# EAGLE board uc2950-v1 (EAGLE 8.7.1)
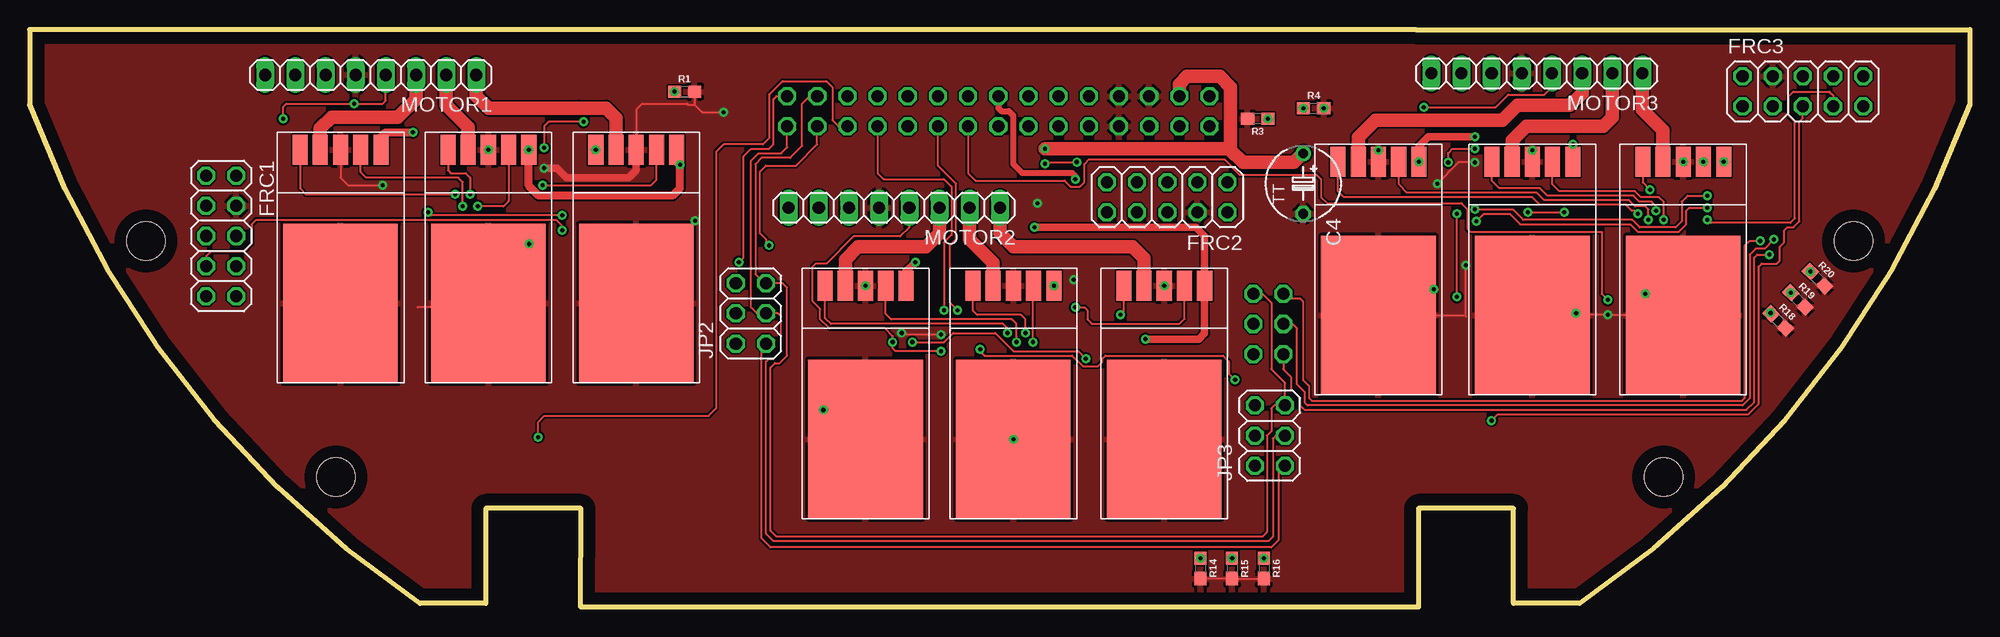
[diagram p0: board, top side]
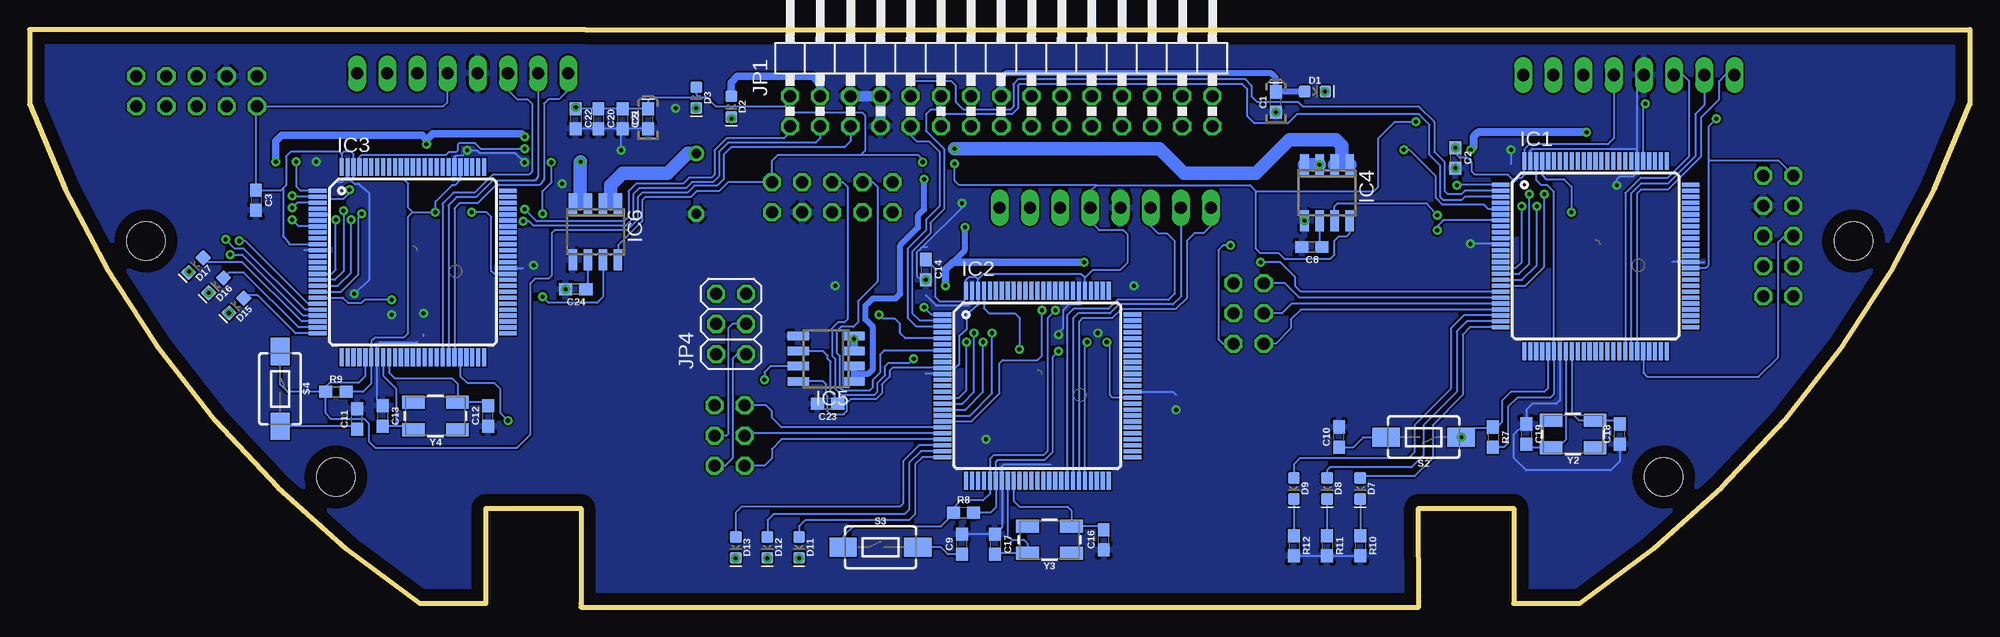
[diagram p1: board, bottom side, seen from below]

Size 163.33 x 48.61 mm. Coordinates in mm from the lower left corner, seen from the top.
Outline: 116.92,0 116.92,8.32 124.92,8.32 124.92,0.32 130.5,0.32 arc36 163.33,42.32 163.33,48.61 116.67,48.61
Outline: 38.4,8.32 46.4,8.32 46.4,0 116.92,0
Outline: 38.4,0.32 32.83,0.32 arc-36 0,42.32 0,48.61 116.59,48.61
Outline: 116.92,0.32 116.92,0
Outline: 38.4,8.32 38.4,0.32
Copper layers (1*16): Top 0.035mm / dielectric 1.5mm / Bottom 0.035mm
Design rules "default": minimum track width 6mil, minimum drill 0.35mm, track to track 6mil, track to pad 6mil, pad to pad 6mil, via to via 6mil, smd to smd 6mil, copper to edge 40mil, drill to drill 6mil, minimum pad ring 10mil, minimum via ring 8mil, stop-mask expansion 4mil, vias tented up to drill 0mil, thermal gap 10mil
Holes 3.2 mm at 137.55,10.96 25.77,10.96 9.78,30.82 153.55,30.82

## Footprints (pad centres in the part's own frame; a part is rotated, then mirrored left to right if it is on the bottom)
0603-POLAR = smd 1.1 x 1: + 0.85,0; - -0.85,0
0603 = smd 1.1 x 1: 1 -0.85,0; 2 0.85,0
TAP5-60 = drill 0.813: + -2.54,0 | drill 0.813 octagon: - 2.54,0
LED-0603 = smd 1 x 1: A -0.877,0; C 0.877,0
2X05 = drill 1.016 octagon: 1 -5.08,-1.27; 2 -5.08,1.27; 3 -2.54,-1.27; 4 -2.54,1.27; 5 0,-1.27; 6 0,1.27; 7 2.54,-1.27; 8 2.54,1.27; 9 5.08,-1.27; 10 5.08,1.27
TQFP100 = smd 1.5 x 0.35: 1 -8,6; 2 -8,5.5; 3 -8,5; 4 -8,4.5; 5 -8,4; 6 -8,3.5; 7 -8,3; 8 -8,2.5; 9 -8,2; 10 -8,1.5; 11 -8,1; 12 -8,0.5; 13 -8,0; 14 -8,-0.5; 15 -8,-1; 16 -8,-1.5; 17 -8,-2; 18 -8,-2.5; 19 -8,-3; 20 -8,-3.5; 21 -8,-4; 22 -8,-4.5; 23 -8,-5; 24 -8,-5.5; 25 -8,-6; 51 8,-6; 52 8,-5.5; 53 8,-5; 54 8,-4.5; 55 8,-4; 56 8,-3.5; 57 8,-3; 58 8,-2.5; 59 8,-2; 60 8,-1.5; 61 8,-1; 62 8,-0.5; 63 8,0; 64 8,0.5; 65 8,1; 66 8,1.5; 67 8,2; 68 8,2.5; 69 8,3; 70 8,3.5; 71 8,4; 72 8,4.5; 73 8,5; 74 8,5.5; 75 8,6 | smd 0.35 x 1.5: 26 -6,-8; 27 -5.5,-8; 28 -5,-8; 29 -4.5,-8; 30 -4,-8; 31 -3.5,-8; 32 -3,-8; 33 -2.5,-8; 34 -2,-8; 35 -1.5,-8; 36 -1,-8; 37 -0.5,-8; 38 0,-8; 39 0.5,-8; 40 1,-8; 41 1.5,-8; 42 2,-8; 43 2.5,-8; 44 3,-8; 45 3.5,-8; 46 4,-8; 47 4.5,-8; 48 5,-8; 49 5.5,-8; 50 6,-8; 76 6,8; 77 5.5,8; 78 5,8; 79 4.5,8; 80 4,8; 81 3.5,8; 82 3,8; 83 2.5,8; 84 2,8; 85 1.5,8; 86 1,8; 87 0.5,8; 88 0,8; 89 -0.5,8; 90 -1,8; 91 -1.5,8; 92 -2,8; 93 -2.5,8; 94 -3,8; 95 -3.5,8; 96 -4,8; 97 -4.5,8; 98 -5,8; 99 -5.5,8; 100 -6,8
SO08 = smd 0.72 x 1.78: 1 -1.905,-2.35; 2 -0.635,-2.35; 3 0.635,-2.35; 4 1.905,-2.35; 5 1.905,2.35; 6 0.635,2.35; 7 -0.635,2.35; 8 -1.905,2.35
2X15/90 = drill 1.016 octagon: 1 -17.78,-6.35; 2 -17.78,-3.81; 3 -15.24,-6.35; 4 -15.24,-3.81; 5 -12.7,-6.35; 6 -12.7,-3.81; 7 -10.16,-6.35; 8 -10.16,-3.81; 9 -7.62,-6.35; 10 -7.62,-3.81; 11 -5.08,-6.35; 12 -5.08,-3.81; 13 -2.54,-6.35; 14 -2.54,-3.81; 15 0,-6.35; 16 0,-3.81; 17 2.54,-6.35; 18 2.54,-3.81; 19 5.08,-6.35; 20 5.08,-3.81; 21 7.62,-6.35; 22 7.62,-3.81; 23 10.16,-6.35; 24 10.16,-3.81; 25 12.7,-6.35; 26 12.7,-3.81; 27 15.24,-6.35; 28 15.24,-3.81; 29 17.78,-6.35; 30 17.78,-3.81
2X03 = drill 1.016 octagon: 1 -2.54,-1.27; 2 -2.54,1.27; 3 0,-1.27; 4 0,1.27; 5 2.54,-1.27; 6 2.54,1.27
UC2950 = smd 1.27 x 2.54: P$1 1.93,3.607; P$2 3.632,3.607; P$3 5.334,3.607; P$4 7.036,3.607; P$5 8.738,3.607 | smd 9.652 x 13.386: P$6 5.334,-9.309
1X08 = drill 1.016 long: 1 -8.89,0; 2 -6.35,0; 3 -3.81,0; 4 -1.27,0; 5 1.27,0; 6 3.81,0; 7 6.35,0; 8 8.89,0
TACTILE_SWITCH_SMD_6.0X3.5MM = smd 2.3 x 1.6: 1 -3.15,0; 2 3.15,0
CRYSTAL-SMD-5X3.2-4PAD = smd 1.9 x 1.1: 1 -1.85,-1.15; 2 1.85,-1.15; 3 1.85,1.15; 4 -1.85,1.15

## Placement (x,y rotation side)
C1  10uF  [0603-POLAR]  58.43,42.51 90 bottom
C2  0.1uF  [0603]  43.31,37.81 270 bottom
C3  0.1uF  [0603]  144.28,34.25 270 bottom
C4  47uF  [TAP5-60]  107.2,35.65 270 top
C5  10uF  [0603-POLAR]  111.26,41.11 90 bottom
C8  1nF  [0603]  55.38,30.32 180 bottom
C9  0.1uF  [0603]  84.84,5.3 90 bottom
C10  0.1uF  [0603]  53.09,14.32 90 bottom
C11  0.1uF  [0603]  135.77,15.84 90 bottom
C12  22pF  [0603]  124.72,16.09 90 bottom
C13  22pF  [0603]  133.61,16.09 270 bottom
C14  0.1uF  [0603]  87.89,28.41 270 bottom
C16  22pF  [0603]  72.91,5.68 90 bottom
C17  22pF  [0603]  82.05,5.3 270 bottom
C18  22pF  [0603]  29.47,14.57 90 bottom
C19  22pF  [0603]  37.35,14.57 270 bottom
C20  0.1uF  [0603]  115.45,41.11 270 bottom
C21  0.1uF  [0603]  113.42,41.11 270 bottom
C22  0.1uF  [0603]  117.36,41.11 270 bottom
C23  1nF  [0603]  96.15,17.11 180 bottom
C24  1nF  [0603]  117.36,26.76 180 bottom
D1  Yellow  [LED-0603]  55.13,43.4 0 bottom
D2  Yellow  [LED-0603]  104.27,42.13 270 bottom
D3  Yellow  [LED-0603]  107.2,42.89 270 bottom
D7  Yellow  [LED-0603]  51.32,10 270 bottom
D8  Yellow  [LED-0603]  54.11,10 270 bottom
D9  Yellow  [LED-0603]  56.9,10 270 bottom
D11  Yellow  [LED-0603]  98.56,5.04 270 bottom
D12  Yellow  [LED-0603]  101.23,5.04 270 bottom
D13  Yellow  [LED-0603]  103.89,5.04 270 bottom
D15  Yellow  [LED-0603]  145.93,25.38 225 bottom
D16  Yellow  [LED-0603]  147.63,27.09 225 bottom
D17  Yellow  [LED-0603]  149.34,28.8 225 bottom
FRC1  [2X05]  16.12,31.24 270 top
FRC2  [2X05]  95.77,34.51 180 top
FRC3  [2X05]  149.28,43.43 0 top
IC1  ATMEGA2560-16AU  [TQFP100]  31.5,29.56 0 bottom
IC2  ATMEGA2560-16AU  [TQFP100]  78.49,18.63 0 bottom
IC3  ATMEGA2560-16AU  [TQFP100]  131.07,29.05 0 bottom
IC4  ACS712  [SO08]  54.11,34.89 180 bottom
IC5  ACS712  [SO08]  96.27,20.92 90 bottom
IC6  ACS712  [SO08]  115.7,31.59 180 bottom
JP1  [2X15/90]  81.54,46.83 0 bottom
JP2  [2X03]  60.71,24.73 90 top
JP3  [2X03]  104.4,14.44 90 top
JP4  [2X03]  104.27,23.84 90 bottom
MIC1  [UC2950]  20.84,34.89 0 top
MIC2  [UC2950]  33.28,34.89 0 top
MIC3  [UC2950]  45.73,34.89 0 top
MIC4  [UC2950]  65.03,23.46 0 top
MIC5  [UC2950]  77.48,23.46 0 top
MIC6  [UC2950]  90.18,23.46 0 top
MIC7  [UC2950]  133.87,33.87 0 top
MIC8  [UC2950]  121.17,33.87 0 top
MIC9  [UC2950]  108.21,33.87 0 top
MOTOR1  [1X08]  28.71,44.8 180 top
MOTOR2  [1X08]  72.78,33.62 180 top
MOTOR3  [1X08]  126.88,44.92 180 top
R1  1k  [0603]  55.13,43.4 0 top
R3  1k  [0603]  103.39,41.11 180 top
R4  1k  [0603]  108.08,42 0 top
R7  1k  [0603]  40.14,14.32 270 bottom
R8  1k  [0603]  84.72,7.97 0 bottom
R9  1k  [0603]  137.55,18.13 0 bottom
R10  1k  [0603]  51.32,5.17 270 bottom
R11  1k  [0603]  54.11,5.17 270 bottom
R12  1k  [0603]  56.9,5.17 270 bottom
R14  1k  [0603]  98.56,3.27 270 top
R15  1k  [0603]  101.23,3.27 270 top
R16  1k  [0603]  103.89,3.27 270 top
R18  1k  [0603]  147.2,24.09 315 top
R19  1k  [0603]  148.85,25.87 315 top
R20  1k  [0603]  150.5,27.65 315 top
S2  MOMENTARY-SWITCH-SPST-SMD-6.0X3.5MM  [TACTILE_SWITCH_SMD_6.0X3.5MM]  45.98,14.32 180 bottom
S3  MOMENTARY-SWITCH-SPST-SMD-6.0X3.5MM  [TACTILE_SWITCH_SMD_6.0X3.5MM]  91.7,5.04 0 bottom
S4  MOMENTARY-SWITCH-SPST-SMD-6.0X3.5MM  [TACTILE_SWITCH_SMD_6.0X3.5MM]  142.25,18.38 270 bottom
Y2  16MHz  [CRYSTAL-SMD-5X3.2-4PAD]  33.41,14.57 180 bottom
Y3  16MHz  [CRYSTAL-SMD-5X3.2-4PAD]  77.48,5.68 180 bottom
Y4  16MHz  [CRYSTAL-SMD-5X3.2-4PAD]  129.17,16.09 180 bottom

## Library data of the parts
C1 C5 = SparkFun-Capacitors; PROD_ID: CAP-13210
C2 C3 C9-C11 C14 C20-C22 = SparkFun-Capacitors; PROD_ID: CAP-08604
C4 = rcl; SPICEPREFIX: C
C8 C23 C24 = SparkFun-Capacitors; PROD_ID: CAP-07886
C12 C13 C16-C19 = SparkFun-Capacitors; PROD_ID: CAP-07876
D1-D3 D7-D9 D11-D13 D15-D17 = SparkFun-LED; PROD_ID: DIO-09003
FRC1-FRC3 JP1-JP4 MOTOR1-MOTOR3 = pinhead
IC1-IC3 = atmel-2005
IC4-IC6 = ACS712
MIC1-MIC9 = uc2950
R1 R3 R4 R7-R12 R14-R16 R18-R20 = SparkFun-Resistors; PROD_ID: RES-07856
S2-S4 = SparkFun-Switches; PROD_ID: SWCH-00815; SF_SKU: COM-08229
Y2-Y4 = SparkFun-Clocks; PROD_ID: XTAL-08218; SF_ID: COM-00094

## Nets
5V: C2.1 C3.1 C5.+ C14.1 C20.1 C21.1 C22.1 D3.A FRC1.1 FRC2.1 FRC3.1 IC1.10 IC1.31 IC1.61 IC1.80 IC1.98 IC1.100 IC2.10 IC2.31 IC2.61 IC2.80 IC2.98 IC2.100 IC3.10 IC3.31 IC3.61 IC3.80 IC3.98 IC3.100 IC4.8 IC5.8 IC6.8 JP1.2 MOTOR1.4 MOTOR2.4 MOTOR3.4 R7.2 R8.2 R9.2
12V: C1.+ D1.A IC5.1 IC5.2 JP1.16
18V: C4.+ D2.A IC4.1 IC4.2 IC6.1 IC6.2 JP1.4
ACS1: IC4.3 IC4.4 MIC1.P$5 MIC2.P$5 MIC3.P$5
ACS2: IC5.3 IC5.4 MIC4.P$5 MIC5.P$5 MIC6.P$5
ACS3: IC6.3 IC6.4 MIC7.P$5 MIC8.P$5 MIC9.P$5
CHA1: FRC1.5 IC1.46
CHA2: FRC2.5 IC2.46
CHA3: FRC3.5 IC3.46
CHB1: FRC1.7 IC1.7
CHB2: FRC2.7 IC2.7
CHB3: FRC3.7 IC3.7
CLK: JP1.28 JP2.5 JP3.5 JP4.5
CLK1: IC1.20 JP2.6
CLK2: IC2.20 JP3.6
CLK3: IC3.20 JP4.6
CUR1: IC1.97 IC4.7
CUR2: IC2.97 IC5.7
CUR3: IC3.97 IC6.7
DEB11: D9.A IC1.23
DEB12: D13.A IC2.23
DEB13: D17.A IC3.23
DEB21: D8.A IC1.24
DEB22: D12.A IC2.24
DEB23: D16.A IC3.24
DEB31: D7.A IC1.25
DEB32: D11.A IC2.25
DEB33: D15.A IC3.25
GND: C1.- C2.2 C3.2 C4.- C5.- C8.2 C9.2 C10.2 C11.2 C12.1 C13.1 C14.2 C16.1 C17.1 C18.1 C19.1 C20.2 C21.2 C22.2 C23.2 C24.2 FRC1.4 FRC2.4 FRC3.4 IC1.11 IC1.32 IC1.62 IC1.81 IC1.99 IC2.11 IC2.32 IC2.62 IC2.81 IC2.99 IC3.11 IC3.32 IC3.62 IC3.81 IC3.99 IC4.5 IC5.5 IC6.5 JP1.6 JP1.7 JP1.8 MIC1.P$3 MIC1.P$6 MIC2.P$3 MIC2.P$6 MIC3.P$3 MIC3.P$6 MIC4.P$3 MIC4.P$6 MIC5.P$3 MIC5.P$6 MIC6.P$3 MIC6.P$6 MIC7.P$3 MIC7.P$6 MIC8.P$3 MIC8.P$6 MIC9.P$3 MIC9.P$6 MOTOR1.5 MOTOR2.5 MOTOR3.5 R1.2 R3.2 R4.2 R10.2 R11.2 R12.2 R14.2 R15.2 R16.2 R18.2 R19.2 R20.2
H11: IC1.43 MOTOR1.6
H12: IC2.43 MOTOR2.6
H13: IC3.43 MOTOR3.6
H21: IC1.44 MOTOR1.7
H22: IC2.44 MOTOR2.7
H23: IC3.44 MOTOR3.7
H31: IC1.45 MOTOR1.8
H32: IC2.45 MOTOR2.8
H33: IC3.45 MOTOR3.8
M11: MIC3.P$2 MOTOR1.1
M12: MIC6.P$2 MOTOR2.1
M13: MIC7.P$2 MOTOR3.1
M21: MIC2.P$2 MOTOR1.2
M22: MIC5.P$2 MOTOR2.2
M23: MIC8.P$2 MOTOR3.2
M31: MIC1.P$2 MOTOR1.3
M32: MIC4.P$2 MOTOR2.3
M33: MIC9.P$2 MOTOR3.3
MISO: JP1.27 JP2.1 JP3.1 JP4.1
MISO1: IC1.22 JP2.2
MISO2: IC2.22 JP3.2
MISO3: IC3.22 JP4.2
MOSI: JP1.29 JP2.3 JP3.3 JP4.3
MOSI1: IC1.21 JP2.4
MOSI2: IC2.21 JP3.4
MOSI3: IC3.21 JP4.4
N$1: D1.C R1.1
N$9: D2.C R3.1
N$13: D3.C R4.1
N$22: C10.1 S2.2
N$25: C11.1 S4.2
N$28: C9.1 S3.2
N$29: C19.2 IC1.33 Y2.3
N$30: C17.2 IC2.33 Y3.3
N$31: C16.2 IC2.34 Y3.1
N$32: C18.2 IC1.34 Y2.1
N$33: C13.2 IC3.33 Y4.3
N$34: C12.2 IC3.34 Y4.1
N$41: C8.1 IC4.6
N$44: C23.1 IC5.6
N$47: C24.1 IC6.6
N$51: D7.C R10.1
N$52: D8.C R11.1
N$53: D9.C R12.1
N$56: D11.C R14.1
N$57: D12.C R15.1
N$58: D13.C R16.1
N$61: D15.C R18.1
N$62: D16.C R19.1
N$63: D17.C R20.1
RST1: IC1.30 JP1.25 R7.1 S2.1
RST2: IC2.30 JP1.23 R8.1 S3.1
RST3: IC3.30 JP1.5 R9.1 S4.1
RX1: IC1.2 JP1.10
RX2: IC2.2 JP1.12
RX3: IC3.2 JP1.1
S11: IC1.1 MIC3.P$4
S12: IC2.1 MIC6.P$4
S13: IC3.1 MIC7.P$4
S21: IC1.5 MIC3.P$1
S22: IC2.5 MIC6.P$1
S23: IC3.5 MIC7.P$1
S31: IC1.15 MIC2.P$4
S32: IC2.15 MIC5.P$4
S33: IC3.15 MIC8.P$4
S41: IC1.16 MIC2.P$1
S42: IC2.16 MIC5.P$1
S43: IC3.16 MIC8.P$1
S51: IC1.17 MIC1.P$4
S52: IC2.17 MIC4.P$4
S53: IC3.17 MIC9.P$4
S61: IC1.18 MIC1.P$1
S62: IC2.18 MIC4.P$1
S63: IC3.18 MIC9.P$1
SS1: IC1.19 JP1.30
SS2: IC2.19 JP1.19
SS3: IC3.19 JP1.17
TX1: IC1.3 JP1.11
TX2: IC2.3 JP1.9
TX3: IC3.3 JP1.3

## Tracks (layer width: path | path; a pad name or v marks a point on that pad's centre or on a via)
5V  (via drill 0.35)
  Top 0.152: MOTOR1.4 29.98,42.64 29.73,42.38 v27.31,42.38 21.6,42.38 21.34,42.13 v21.34,41.11 | v126.12,33.24 v129.18,33.24 | v117.36,42.09 123.41,42.09 124.47,43.14 127.52,43.14 128.15,43.78 MOTOR3.4 | v46.62,40.86 43.7,40.86 43.31,40.48 C2.1 | v85.48,37.33 85.62,37.47 v88.15,37.47 | MOTOR2.4 74.05,31.97 73.29,31.21 69.35,31.21 67.06,28.92 66.17,28.92 65.92,28.67 65.92,25.75 66.56,25.11 66.56,24.22 67.32,23.46 72.02,23.46 72.65,22.82 v72.65,22.32 72.65,21.81 72.91,21.55 v76.72,21.55
  Bottom 0.152: R7.2 39.21,13.47 38.87,13.81 38.87,16.86 38.11,17.62 35.31,17.62 35,17.93 IC1.31 35,34.96 35.57,35.52 36.08,35.52 36.5,35.95 36.5,36.46 | MOTOR1.4 29.98,39.46 30.49,38.95 36.46,38.95 | 36.46,38.95 37.09,38.95 37.5,38.54 IC1.100 37.5,36.54 | IC1.80 27.5,42.19 v27.31,42.38 | 83.51,27.59 83.49,27.57 IC2.98 83.49,25.44 84.46,24.6 84.46,23.33 85.1,22.82 85.1,20.41 85.38,20.13 IC2.10 90.71,20.13 90.94,19.9 90.94,19.4 91.57,18.76 91.57,18 92.08,17.49 94.24,17.49 94.52,17.21 94.52,16.51 94.81,16.22 95.89,16.22 96.15,16.47 96.15,17.74 96.27,17.87 96.27,18.76 96.53,19.01 IC5.8 | 83.51,27.59 83.7,27.78 84.27,27.78 84.49,27.55 IC2.100 84.49,25.97 84.72,25.75 86.75,25.75 87.13,26.13 87.13,28.54 87.85,29.26 C14.1 | 83.83,7.97 82.43,7.97 81.99,8.4 IC2.31 81.99,12.21 81.8,12.41 77.86,12.41 77.22,13.05 77.22,21.05 v76.72,21.55 | 83.83,7.97 R8.2 | IC1.10 38.76,31.06 38.52,31.29 38.52,31.3 38.49,31.33 38.49,35.65 | 37.5,36.54 37.5,36.38 37.73,36.16 37.98,36.16 38.49,35.65 | JP1.2 99.32,42.64 | 99.32,42.64 99.83,42.13 105.54,42.13 106.31,42.89 106.94,42.89 | 106.94,42.89 107.2,43.14 D3.A | 106.94,42.89 111.01,42.89 111.26,42.64 C5.+ C21.1 C20.1 C22.1 v117.36,42.09 | IC2.80 74.49,27.71 | 36.5,38.91 36.46,38.95 | R9.2 135.26,18.13 134.57,18.82 IC3.31 134.57,22.37 134.25,22.7 131.83,22.7 131.45,23.08 131.45,32.86 131.07,33.24 | 38.49,35.65 38.49,36.03 38.87,36.41 41.66,36.41 41.92,36.67 41.92,37.43 42.3,37.81 42.93,37.81 43.31,38.19 C2.1 | IC3.10 141.46,30.55 141.99,31.21 141.99,35.27 | 137.07,38.16 IC3.100 | 137.07,38.16 136.91,38.32 136.28,38.32 136.07,38.11 IC3.98 136.07,36.21 135.9,36.03 131.83,36.03 131.45,35.65 131.45,33.62 131.07,33.24
  Bottom 0.152: 137.07,38.16 137.23,38.32 141.36,38.32 141.74,37.94 141.74,35.52 141.99,35.27 | IC3.80 127.07,35.97 127.52,35.52 127.77,35.52 129.17,34.13 v129.17,33.24 v129.18,33.24 131.07,33.24 | IC3.61 124.23,28.05 124.47,28.29 124.47,32.86 124.85,33.24 v126.12,33.24 | IC1.61 22.22,28.56 21.98,28.79 21.98,37.56 | 21.98,37.56 21.98,40.48 v21.34,41.11 | 36.5,36.46 37.42,36.46 37.5,36.54 | 36.5,36.46 IC1.98 | 73.54,35.52 74.05,35.02 MOTOR2.4 74.05,32.48 73.29,31.71 71.25,31.71 70.87,31.33 70.87,29.05 71.51,28.41 73.79,28.41 74.49,27.71 | 73.54,35.52 60.59,35.52 60.08,35.02 | v46.62,40.86 48.39,40.86 49.79,39.46 49.79,35.4 50.17,35.02 60.08,35.02 | IC4.8 52.2,31.46 52.46,31.21 53.09,31.21 53.47,30.83 53.47,29.68 53.86,29.3 57.67,29.3 58.17,29.81 59.7,29.81 60.08,30.19 60.08,35.02 | FRC1.1 16.08,37.56 21.98,37.56 | 141.99,35.27 142.16,35.1 C3.1 144.28,42.08 FRC3.1 128.5,42.16 128.15,42.51 MOTOR3.4 | 93.35,38.06 100.34,38.06 100.85,37.56 FRC2.1 104.53,35.78 105.29,35.02 107.2,35.02 107.7,34.51 111.51,34.51 111.77,34.25 111.77,32.48 113.8,30.44 IC6.8 | 93.35,38.06 92.97,38.45 92.97,41.37 93.23,41.62 99.07,41.62 99.32,41.87 99.32,42.64 | 74.49,27.71 74.81,28.03 83.07,28.03 83.51,27.59 | 93.35,38.06 88.53,38.06 88.15,37.68 v88.15,37.47 | 73.54,35.52 85.1,35.52 85.48,35.91 v85.48,37.33 | 83.83,7.46 83.83,7.97 | IC2.61 72.16,17.63 72.4,17.87 72.4,22.06 v72.65,22.32
  other vias: 43.31,38.66
12V  (via drill 0.35)
  Top 0.508: JP1.16 81.54,42 81.8,41.75 82.43,41.75 82.81,41.37 82.81,37.3 83.57,36.54 87.76,36.54 88.02,36.29 v88.02,36.03
  Bottom 0.508: IC5.1 93.92,19.65 | 93.92,19.65 IC5.2 | 93.92,19.65 92.72,19.65 92.34,20.03 92.34,23.59 92.97,24.22 92.97,25.36 92.34,26 90.43,26 90.05,26.38 90.05,30.44 88.53,31.97 88.53,32.98 88.02,33.49 v88.02,36.03 | JP1.16 81.54,44.54 81.16,44.92 58.81,44.92 58.43,44.54 C1.+ 58.39,43.4 D1.A
18V  (via drill 0.35)
  Top 1.143: JP1.4 96.78,44.03 97.42,44.67 100.21,44.67 101.1,43.78 101.1,38.45 | 101.1,38.45 102.12,37.43 106.43,37.43 C4.+ | 101.1,38.45 100.97,38.57 v85.48,38.57
  Bottom 0.635: JP1.4 96.78,44.03 97.42,44.67 103.77,44.67 104.27,44.16 D2.A
  Bottom 0.762: IC6.1 114.43,33.94 IC6.2
  Bottom 1.143: C4.+ 107.96,38.19 109.61,36.54 113.42,36.54 114.43,35.52 114.43,33.94 | v85.48,38.57 68.21,38.57 66.17,36.54 60.08,36.54 57.28,39.33 53.35,39.33 52.84,38.83 52.84,37.3 | 52.84,37.3 52.27,37.3 IC4.1 | 52.84,37.3 53.41,37.3 IC4.2
ACS1  (via drill 0.35)
  Top 0.66: IC4.3 54.74,35.27 54.11,34.64 42.86,34.64 42.02,35.48 MIC2.P$5 | MIC1.P$5 29.57,39.56 29.98,39.97 v32.27,39.97
  Top 0.762: MIC3.P$5 54.47,37.52 IC4.3
  Bottom 0.152: IC4.3 54.77,37.24
  Bottom 0.66: v32.27,39.97 41.41,39.97 41.79,39.59 41.79,38.72 MIC2.P$5
  Bottom 1.143: 54.77,37.24 IC4.4
  other vias: 54.74,37.24 42.02,38.5
ACS2  (via drill 0.35)
  Top 0.635: MIC4.P$5 73.77,28.26 v74.56,29.05 | v84.59,31.97 98.18,31.97 98.92,31.23 MIC6.P$5 98.92,23.05 98.43,22.57 v93.92,22.57
  Bottom 0.508: 85.61,29.05 84.59,30.06 v84.59,31.97
  Bottom 0.635: v74.56,29.05 85.61,29.05 86.22,28.44 MIC5.P$5 | IC5.4 v93.92,22.57 IC5.3
  other vias: 86.22,27.07
ACS3  (via drill 0.35)
  Top 0.635: v129.93,38.95 129.9,38.93 MIC8.P$5 | MIC9.P$5 116.95,38.8 117.74,39.59 v121.67,39.59
  Bottom 0.635: MIC7.P$5 142.6,39.23 142.12,39.72 130.31,39.72 129.93,39.33 | 129.93,39.33 v129.93,38.95 | v121.67,39.59 121.93,39.84 129.42,39.84 129.93,39.33
  Bottom 0.762: IC6.3 116.97,33.94 IC6.4
  Bottom 1.143: MIC9.P$5 116.97,37.45 116.97,33.94
  other vias: 116.95,37.48 142.6,37.48
CHA1
  Bottom 0.152: IC1.46 27.5,19.71 27.19,19.4 17.79,19.4 16.14,21.05 16.14,30.7 15.59,31.24 FRC1.5
CHA2  (via drill 0.35)
  Top 0.152: v74.3,22.32 76.97,22.32 77.73,23.08 81.29,23.08 82.81,21.55 88.27,21.55 v88.91,20.92
  Bottom 0.152: IC2.46 74.49,21.87 74.3,22.06 v74.3,22.32 | FRC2.5 94.88,35.78 94.5,35.4 94.5,24.22 94.75,23.97 95.26,23.97 95.89,23.33 95.77,23.21 95.77,21.17 95.51,20.92 95.51,18.38 95,17.87 92.21,17.87 91.96,18.13 91.96,18.89 91.32,19.52 91.32,20.28 91.07,20.54 89.29,20.54 v88.91,20.92
CHA3  (via drill 0.35)
  Top 0.152: v123.07,15.71 123.58,16.22 144.66,16.22 145.55,17.11 145.55,28.67 145.8,28.92 147.07,28.92 147.33,29.17 147.33,30.32 147.71,30.7 147.71,31.71 147.96,31.97 148.47,31.97 148.98,32.48 148.98,40.86 149.28,41.16 FRC3.5
  Bottom 0.152: IC3.46 127.07,19.46 126.5,18.89 124.21,18.89 123.71,18.38 123.71,16.35 v123.07,15.71
CHB1  (via drill 0.35)
  Top 0.152: FRC1.7 14.85,29.54 15.25,29.94 18.04,29.94 18.68,30.57 18.68,32.22 19.06,32.6 44.33,32.6 44.84,32.1 v44.84,31.71
  Bottom 0.152: IC1.7 44.33,32.56 | 44.33,32.56 44.38,32.56 | 44.33,32.56 44.84,32.05 v44.84,31.71
CHB2
  Bottom 0.152: FRC2.7 92.34,35.78 91.96,35.4 91.96,27.4 93.61,25.75 93.61,23.97 93.99,23.59 95,23.59 95.38,23.21 95.38,21.43 95.13,21.17 95.13,18.51 94.88,18.25 92.59,18.25 92.34,18.51 92.34,19.14 91.7,19.78 91.7,21.3 91.37,21.63 IC2.7
CHB3  (via drill 0.35)
  Top 0.152: FRC3.7 151.82,43.1 151.52,43.4 148.47,43.4 148.09,43.02 148.09,41.37 148.6,40.86 148.6,32.73 148.22,32.35 141.49,32.35 v141.23,32.6
  Bottom 0.152: IC3.7 140.68,32.05 v141.23,32.6
CLK
  Top 0.152: JP1.28 65.67,43.02 65.03,42.38 65.03,38.83 64.02,37.81 61.6,37.81 61.09,37.3 61.09,28.03 61.86,27.27 JP2.5 63.38,27.27 63.76,26.89 63.76,21.17 63.13,20.54 62.75,20.54 62.36,20.16 62.36,6.44 62.87,5.93 103.77,5.93 104.15,6.31 104.15,14.44 104.53,14.82 104.53,16.73 104.78,16.98 JP3.5 105.67,18.89 104.53,20.03 104.53,25.62 103.77,26.38 JP4.5
CLK1
  Bottom 0.152: IC1.20 56.45,26.06 57.67,27.27 JP2.6
CLK2
  Bottom 0.152: IC2.20 100.01,15.13 100.85,15.97 100.85,16.47 101.35,16.98 JP3.6
CLK3  (via drill 0.35)
  Top 0.152: JP4.6 105.54,26.25 105.8,26 106.94,26 107.2,25.75 107.2,19.14 107.7,18.63 107.7,17.62 107.96,17.36 144.15,17.36 144.41,17.62 144.41,30.44 144.79,30.83 v145.68,30.83
  Bottom 0.152: IC3.20 139.89,25.55 145.17,30.83 v145.68,30.83
CUR1  (via drill 0.35)
  Top 0.152: v33.54,33.24 33.79,32.98 v44.84,32.98
  Bottom 0.152: IC1.97 36,36.34 35.69,36.03 34.17,36.03 33.54,35.4 v33.54,33.24 | IC4.7 53.47,33.75 53.22,34 45.73,34 45.09,33.24 v44.84,32.98
CUR2  (via drill 0.35)
  Top 0.152: v80.02,21.71 80.02,21.55 80.4,21.17 87.76,21.17 88.65,20.28 89.92,20.28 90.3,20.67 90.3,20.92 90.56,21.17 100.46,21.17 100.97,20.67 100.97,19.65 v101.48,19.14
  Bottom 0.152: v101.48,19.14 101.48,19.78 100.97,20.28 IC5.7 | IC2.97 82.99,25.17 82.56,24.73 80.4,24.73 80.02,24.35 v80.02,21.71
CUR3  (via drill 0.35)
  Top 0.152: v120.15,26.13 v120.15,33.11 | v119.42,37.43 119.42,38.22 119.77,38.57 v121.67,38.57
  Bottom 0.152: IC3.97 135.57,37.88 135.39,38.06 128.28,38.06 128.01,38.33 127.39,38.33 127.26,38.46 127.26,38.95 127.13,39.08 125.86,39.08 125.36,38.57 v121.67,38.57 | IC6.7 115.07,26.13 115.58,25.62 119.64,25.62 v120.15,26.13 | v120.15,33.11 120.15,35.02 119.39,35.78 119.39,37.4 v119.42,37.43
DEB11
  Bottom 0.152: IC1.23 42.6,24.56 43.7,23.46 43.7,18.38 46.74,15.33 46.74,13.05 47.25,12.54 56.4,12.54 56.9,12.03 D9.A
DEB12
  Bottom 0.152: IC2.23 88.45,13.63 89.8,12.28 89.8,8.73 90.05,8.47 103.39,8.47 103.89,7.97 D13.A
DEB13
  Bottom 0.152: IC3.23 140.42,24.05 145.42,29.05 148.35,29.05 D17.A
DEB21
  Bottom 0.152: IC1.24 42.34,24.06 43.19,23.21 43.19,18.13 45.98,15.33 45.98,12.79 47,11.78 53.86,11.78 54.11,11.52 D8.A
DEB22
  Bottom 0.152: IC2.24 88.31,13.13 89.29,12.16 89.29,8.22 89.67,7.84 100.72,7.84 101.23,7.33 D12.A
DEB23
  Bottom 0.152: IC3.24 140.68,23.55 145.3,28.16 145.93,28.16 | 145.93,28.16 | 145.93,28.16 146.57,28.16 D16.A
DEB31
  Bottom 0.152: IC1.25 42.08,23.56 42.68,22.95 42.68,17.87 45.22,15.33 45.22,12.54 46.74,11.01 51.18,11.01 D7.A
DEB32
  Bottom 0.152: IC2.25 88.18,12.63 88.78,12.03 88.78,7.84 89.29,7.33 98.05,7.33 98.56,6.82 D11.A
DEB33
  Bottom 0.152: IC3.25 140.95,23.05 144.15,26.25 145.06,26.25 D15.A
GND  (via drill 0.35)
  Top 0.152: R1.2 55.98,42.29 | C1.- 56.61,41.66 55.98,42.29 | R16.2 R15.2 R14.2 | MIC3.P$3 51.06,41.87 51.57,42.38 55.3,42.38 55.39,42.29 55.98,42.29 | MIC7.P$6 132.89,24.56 v132.85,24.6 130.18,24.6 v130.18,24.73 | MIC8.P$3 v126.5,38.45 | MIC9.P$3 v113.55,38.45 | MIC1.P$3 26.17,36.16 26.8,35.52 v29.73,35.52 | 66.81,16.35 v66.81,16.6 | 32.65,25.24 38.27,25.24 MIC2.P$6 38.62,30.06 39.12,30.57 v42.04,30.57 | v76.72,22.95 73.54,22.95 v73.41,23.08 | v120.91,28.79 120.91,24.48 120.82,24.56 MIC9.P$6 115.74,26.76 C24.2 | v121.67,37.43 120.28,37.43 v118.5,35.65
  Top 0.635: MIC3.P$3 51.06,36.79 50.43,36.16 45.22,36.16 44.42,36.96 C2.2
  Bottom 0.152: IC1.32 34.5,17.41 34.81,17.11 36.84,17.11 37.35,16.6 C19.1 37.51,15.42 38.36,14.57 38.36,12.54 37.35,11.52 30.23,11.52 29.47,12.28 C18.1 | R12.2 R11.2 R10.2 | MOTOR1.5 28,44.23 28,38.57 | IC2.99 83.99,25.71 84.34,25.36 87,25.36 87.89,26.25 | C9.2 C17.1 81.49,6.7 IC2.32 81.49,11.82 81.29,12.03 77.35,12.03 | C5.- C21.2 | C21.2 C20.2 C22.2 | MIC2.P$3 38.62,37.3 | 43.28,36.92 C2.2 | 22.36,29.05 IC1.62 25.02,29.06 25.03,29.05 | 28,38.57 IC1.81 28,36.61 28.33,36.29 29.47,36.29 29.73,36.03 v29.73,35.52 | v42.04,30.57 39.52,30.57 IC1.11 | MIC5.P$6 82.81,14.19 | IC3.99 136.57,36.29 | 136.57,36.29 136.57,36.2 136.02,35.65 135.64,35.65 134.75,34.89 134.75,27.52 v136.02,26.38 | IC3.11 140.2,30.05 140.22,30.06 | MIC7.P$3 139.2,37.43 | 136.57,36.29 137.08,35.78 137.42,35.78 | 123.06,28.54 IC3.62 121.81,28.55 121.8,28.54 | v113.55,38.45 113.55,40.14 C21.2 | IC2.11 87.88,19.63 87.89,19.65 | MIC4.P$3 70.37,27.02 | IC1.99 37,38.41 36.84,38.57 28,38.57 | 66.81,17.87 67.07,18.13 IC2.62 | 130.69,22.32 133.87,22.32 134.07,22.11 IC3.32 134.07,17.4 C13.1 | 130.18,22.82 130.18,22.95 | IC2.81 74.99,25.56 75.06,25.49 75.83,25.49 76.33,24.98 76.33,23.46 76.72,23.08 v76.72,22.95 | 88.15,30.32 87.76,30.32 | 88.15,30.32 88.42,30.04 88.49,30.04 88.65,29.87 88.65,27.9 88.31,27.56 C14.2 | R4.2 108.85,42 | 88.15,30.32 84.84,33.62 v84.84,34 | IC3.81 127.57,37.88 127.43,38.03 126.88,38.03 126.5,38.41 v126.5,38.45 125.66,38.45 125.48,38.27 122.51,38.27 v121.67,37.43
  Bottom 0.889: JP1.6 JP1.8 JP1.7
  other vias: 58.43,41.66 38.62,38.5 82.81,14.15 43.31,36.96 139.2,37.48 70.37,27.07 95.51,27.07 56.01,32.54 87.89,27.56 118.21,26.76 108.93,42
  pour Top: 0.01,48.61 163.33,48.61 163.33,42.26 arc-36 130.56,0.35 124.98,0.35 124.98,8.22 116.85,8.22 116.85,0.09 46.49,0.09 46.49,8.22 38.36,8.22 38.36,0.35 32.77,0.35 arc-36 0.01,42.26
  pour Bottom: 0.01,48.61 163.33,48.61 163.33,42.26 arc-36 130.56,0.35 124.98,0.35 124.98,8.22 116.85,8.22 116.85,0.09 46.49,0.09 46.49,8.22 38.36,8.22 38.36,0.35 32.77,0.35 arc-36 0.01,42.26
H11
  Bottom 0.152: IC1.43 29,34.85 27.69,36.16 25.41,36.16 23.63,37.94 23.63,44.29 24.14,44.8 MOTOR1.6
H12
  Bottom 0.152: MOTOR2.6 68.97,32.1 68.33,31.46 67.57,31.46 66.94,30.83 66.94,26.38 67.44,25.87 71.76,25.87 72.52,25.11 75.45,25.11 75.99,24.56 IC2.43
H13
  Bottom 0.152: IC3.43 128.57,33.96 127.64,34.89 125.86,34.89 124.34,36.41 121.29,36.41 121.04,36.67 121.04,42.38 121.42,42.76 122.31,42.76 123.07,43.53 MOTOR3.6
H21
  Bottom 0.152: IC1.44 28.5,34.84 27.69,35.65 25.41,35.65 23.12,37.94 23.12,41.49 22.36,42.26 MOTOR1.7
H22
  Bottom 0.152: IC2.44 75.49,24.3 75.06,24.73 72.4,24.73 71.64,25.49 67.06,25.49 66.43,26.13 MOTOR2.7
H23
  Bottom 0.152: IC3.44 128.07,33.83 127.39,34.51 125.74,34.51 124.34,35.91 120.78,35.91 120.53,36.29 MOTOR3.7
H31
  Bottom 0.152: IC1.45 28,34.83 27.69,35.14 25.41,35.14 22.61,37.94 22.61,41.24 21.09,42.76 21.09,44.29 20.58,44.8 MOTOR1.8
H32
  Bottom 0.152: MOTOR2.8 63.89,32.1 64.52,31.46 65.29,31.46 65.92,30.83 65.92,26 66.81,25.11 71.39,25.11 72.15,24.35 74.68,24.35 74.99,24.04 IC2.45
H33
  Bottom 0.152: IC3.45 127.57,33.56 127.13,34 125.61,34 124.09,35.52 120.4,35.52 120.02,36.03 120.02,42.38 119.64,42.76 118.75,42.76 117.99,43.53 MOTOR3.8
M11
  Top 1.143: MOTOR1.1 37.6,43.02 38.62,42 46.24,42 48.52,42 49.36,41.16 MIC3.P$2
M12
  Top 1.143: MOTOR2.1 81.67,31.46 82.81,30.32 92.84,30.32 93.81,29.35 MIC6.P$2
M13
  Top 1.143: MIC7.P$2 137.5,40.15 135.77,41.87 MOTOR3.1
M21
  Top 1.143: MIC2.P$2 36.91,40.4 35.06,42.26 MOTOR1.2
M22
  Top 1.143: MIC5.P$2 81.11,28.97 79.13,30.95 MOTOR2.2
M23
  Top 1.143: MIC8.P$2 124.8,39.28 125.99,40.48 132.47,40.48 133.23,41.24 MOTOR3.2
M31
  Top 1.143: MIC1.P$2 24.47,40.3 25.41,41.24 31,41.24 32.52,42.76 MOTOR1.3
M32
  Top 1.143: MOTOR2.3 76.59,31.46 75.45,30.32 69.73,30.32 68.66,29.25 MIC4.P$2
M33
  Top 1.143: MIC9.P$2 111.84,39.54 113.29,40.99 123.96,40.99 125.23,42.26 129.67,42.26 130.69,43.27 MOTOR3.3
MISO  (via drill 0.35)
  Top 0.152: JP1.27 66.3,38.95 64.52,37.18 61.98,37.18 61.48,36.67 61.48,31.46 61.98,30.95 61.98,30.7 v62.24,30.44 | JP3.1 105.16,11.39 105.16,5.68 104.53,5.04 62.36,5.04 61.6,5.81 61.6,21.81 JP2.1
  Bottom 0.152: JP4.1 103.77,21.3 104.15,20.92 104.15,12.54 104.78,11.9 JP3.1 | v62.24,30.44 62.87,30.44 63.25,30.06 63.25,22.57 62.87,22.19 JP2.1
MISO1
  Bottom 0.152: IC1.22 56.32,25.06 57.16,24.22 57.16,23.46 58.43,22.19 JP2.2
MISO2
  Bottom 0.152: IC2.22 100.01,14.13 100.85,13.3 100.85,12.54 101.48,11.9 JP3.2
MISO3  (via drill 0.35)
  Top 0.152: JP4.2 105.54,20.03 106.18,19.4 106.18,18.38 106.94,17.62 106.94,16.98 107.32,16.6 144.53,16.6 145.17,17.24 145.17,29.43 145.42,29.68 v146.44,29.68
  Bottom 0.152: IC3.22 140.29,24.55 145.42,29.68 v146.44,29.68
MOSI
  Top 0.152: JP1.29 63.76,38.7 63.25,38.19 61.35,38.19 60.71,37.56 60.71,25.24 61.22,24.73 JP2.3 63,24.73 63.25,24.48 63.25,21.55 62.62,20.92 62.24,20.92 61.98,20.67 61.98,6.19 62.62,5.55 104.27,5.55 104.66,5.93 104.66,14.19 104.91,14.44 JP3.3
  Bottom 0.152: JP4.3 104.15,23.84 104.53,23.46 104.53,14.57 104.66,14.44 JP3.3
MOSI1
  Bottom 0.152: IC1.21 57.09,25.56 57.92,24.73 JP2.4
MOSI2
  Bottom 0.152: IC2.21 102.94,14.63 JP3.4
MOSI3  (via drill 0.35)
  Top 0.152: JP4.4 106.31,23.84 106.69,23.46 106.69,18.76 107.32,18.13 107.32,17.24 107.58,16.98 144.2,16.98 144.79,17.57 144.79,29.68 145.3,30.19 146.06,30.19 v146.82,30.95
  Bottom 0.152: IC3.21 140.15,25.05 145.3,30.19 146.06,30.19 v146.82,30.95
N$1  (via drill 0.35)
  Bottom 0.152: D1.C R1.1
  other vias: 54.28,43.4
N$9  (via drill 0.35)
  Bottom 0.152: D2.C 104.24,41.21 R3.1
  other vias: 104.24,41.11
N$13  (via drill 0.35)
  Bottom 0.152: R4.1 107.21,42 D3.C
  other vias: 107.23,42
N$22
  Bottom 0.152: C10.1 51.91,13.47 51.06,14.32 S2.2
N$25
  Bottom 0.152: C11.1 136.01,15.23 S4.2
N$28
  Bottom 0.152: C9.1 86.03,4.45 86.62,5.04 S3.2
N$29
  Bottom 0.152: IC1.33 34,14.1 34.69,13.42 Y2.3 37.05,13.42 C19.2
N$30
  Bottom 0.152: C17.2 81.97,4.53 Y3.3 79.33,5.37 79.64,5.68 80.65,5.68 80.99,6.02 IC2.33
N$31
  Bottom 0.152: IC2.34 80.49,8.95 80.02,8.47 75.95,8.47 75.63,8.15 Y3.1 73.21,6.83 C16.2
N$32
  Bottom 0.152: IC1.34 33.5,16.32 32.91,15.72 Y2.1 29.77,15.72 C18.2
N$33
  Bottom 0.152: Y4.3 131.32,15.24 132.47,15.24 | 132.47,15.24 C13.2 | IC3.33 133.57,19.48 132.47,18.38 132.47,15.24
N$34
  Bottom 0.152: IC3.34 133.07,19.74 132.6,19.27 127.77,19.27 127.32,18.82 Y4.1 125.02,17.24 C12.2
N$41
  Bottom 0.152: IC4.6 54.74,30.53 C8.1
N$44
  Bottom 0.152: C23.1 95.51,17.32 95.51,17.74 95.89,18.13 95.89,20.67 96.15,20.92 96.15,21.17 96.53,21.55 IC5.6
N$47
  Bottom 0.152: IC6.6 116.34,26.93 C24.1
N$51
  Bottom 0.152: D7.C R10.1
N$52
  Bottom 0.152: D8.C R11.1
N$53
  Bottom 0.152: D9.C R12.1
N$56  (via drill 0.35)
  Bottom 0.152: D11.C R14.1
  other vias: 98.56,4.12
N$57  (via drill 0.35)
  Bottom 0.152: R15.1 D12.C
  other vias: 101.23,4.12
N$58  (via drill 0.35)
  Bottom 0.152: D13.C R16.1
  other vias: 103.89,4.12
N$61  (via drill 0.35)
  Top 0.152: D15.C 145.96,24.71 R18.1
  other vias: 146.55,24.76
N$62  (via drill 0.35)
  Bottom 0.152: R19.1
  other vias: 148.25,26.47
N$63  (via drill 0.35)
  Bottom 0.152: D17.C 149.9,28.24 R20.1
  other vias: 149.9,28.25
RST1  (via drill 0.35)
  Top 0.152: v42.81,14.32 42.81,15.59 43.31,16.09 57.16,16.09 57.79,16.73 57.79,38.32 58.43,38.95 61.73,38.95 62.24,39.46 62.24,43.14 63.38,44.29 67.06,44.29 67.57,43.78 67.57,40.99 68.08,40.48 JP1.25
  Bottom 0.152: IC1.30 35.5,18.44 35.82,18.13 38.62,18.13 39.38,17.36 39.38,15.59 39.8,15.17 R7.1 40.23,15.08 41.66,15.08 42.43,14.32 v42.81,14.32 S2.1
RST2  (via drill 0.35)
  Top 0.152: JP1.23 71.38,36.54 71.89,36.03 76.97,36.03 77.6,35.4 77.6,31.34 76.97,30.71 v76.97,24.98
  Bottom 0.152: S3.1 94.85,5.96 93.99,6.82 86.62,6.82 85.57,7.88 R8.1 85.57,8.39 84.97,8.98 83.07,8.98 82.49,9.55 IC2.30 82.49,12.47 82.18,12.79 77.99,12.79 77.6,13.17 77.6,24.35 v76.97,24.98
RST3
  Bottom 0.152: IC3.30 135.07,19.46 135.64,18.89 138.06,18.89 138.4,18.55 R9.1 | R9.1 141.61,18.13 142.25,18.76 S4.1 | JP1.5 94.24,39.21 94.75,38.7 104.27,38.7 104.91,38.06 104.91,36.03 105.47,35.47 107.37,35.47 107.96,34.89 111.77,34.89 112.15,34.51 112.15,32.6 113.04,31.71 119.13,31.71 119.39,31.46 119.39,27.9 119.64,27.65 120.78,27.65 121.17,27.27 121.17,14.57 122.31,13.43 134.25,13.43 134.75,13.93 134.75,15.46 135.14,15.84 137.93,15.84 138.4,16.31 R9.1
RX1
  Bottom 0.152: IC1.2 42.51,35.06 42.81,34.76 43.95,34.76 44.2,35.02 44.2,37.43 45.09,38.32 45.09,40.86 46.36,42.13 56.14,42.13 56.52,42.51 59.95,42.51 60.46,43.02 60.46,43.91 60.97,44.41 80.14,44.41 80.53,44.03 80.53,42.13 80.78,41.87 84.72,41.87 85.35,42.51 85.35,43.91 85.73,44.29 88.78,44.29 89.16,43.91 JP1.10
RX2
  Bottom 0.152: IC2.2 88.44,24.13 89.03,24.73 89.03,29.94 87.51,31.46 87.51,32.35 86.37,33.49 86.37,38.57 87.89,40.1 87.89,41.49 87.51,41.87 87,41.87 86.62,42.26 JP1.12
RX3  (via drill 0.35)
  Top 0.152: v121.67,33.49 124.85,33.49 125.74,32.6 134.91,32.6 135.55,31.97 138.56,31.97 139.07,32.48 139.07,34.13 139.58,34.64 v141.23,34.64
  Bottom 0.152: IC3.2 141.19,34.55 v141.23,34.64 | JP1.1 99.32,39.97 99.83,39.46 104.66,39.46 105.67,38.45 105.67,36.41 105.93,36.16 107.83,36.16 108.34,35.65 112.28,35.65 112.91,35.02 112.91,32.86 113.29,32.48 120.66,32.48 v121.67,33.49
S11  (via drill 0.35)
  Top 0.152: MIC3.P$4 52.76,35.96 52.33,35.52 v43.19,35.52
  Bottom 0.152: IC1.1 43.16,35.56 v43.19,35.52
S12  (via drill 0.35)
  Top 0.152: v88.02,25.24 88.78,25.24 89.03,24.98 89.03,24.22 89.42,23.84 96.78,23.84 97.21,24.27 MIC6.P$4
  Bottom 0.152: IC2.1 87.41,24.63 v88.02,25.24
S13  (via drill 0.35)
  Bottom 0.152: IC3.1 140.5,35.05 140.85,35.4 140.85,37.43 MIC7.P$4
  other vias: 140.9,37.48
S21  (via drill 0.35)
  Bottom 0.152: MIC3.P$1 47.18,38.5 44.97,36.29 44.97,34.46 44.38,33.87 40.9,33.87 40.58,33.56 IC1.5
  other vias: 47.66,38.5
S22  (via drill 0.35)
  Top 0.152: v91.83,24.6 92.11,24.88 MIC6.P$1
  Bottom 0.152: v91.83,24.6 91.51,24.28 90.49,24.28 90.05,23.84 90.05,23.08 89.61,22.63 IC2.5
S23  (via drill 0.35)
  Top 0.152: v136.41,35.14 135.8,35.75 MIC7.P$1
  Bottom 0.152: v136.41,35.14 136.41,34.89 136.91,34.38 137.29,34.38 137.42,34.38 137.93,34.38 138.06,34.25 138.06,33.24 138.25,33.05 IC3.5
S31  (via drill 0.35)
  Top 0.152: MIC2.P$4 40.32,34.18 39.89,33.75 v37.73,33.75
  Bottom 0.152: IC1.15 38.22,28.56 37.73,29.05 v37.73,33.75
S32  (via drill 0.35)
  Top 0.152: MIC5.P$4 84.46,27.02 v84.46,22.32
  Bottom 0.152: IC2.15 85.08,17.63 84.46,18.25 v84.46,22.32
S33  (via drill 0.35)
  Top 0.152: MIC8.P$4 128.2,35.6 128.79,35.02 135.14,35.02 135.64,34.51 137.17,34.51 137.55,34.13 v137.55,32.6
  Bottom 0.152: IC3.15 137.91,28.05 137.55,28.41 v137.55,32.6
S41  (via drill 0.35)
  Top 0.152: MIC2.P$1 35.21,36.77 35.44,36.54 36.71,36.54 37.09,36.16 v37.09,34.76
  Bottom 0.152: IC1.16 37.96,28.06 37.09,28.92 v37.09,34.76
  Bottom 0.203: 39.53,28.03 IC1.16
S42  (via drill 0.35)
  Top 0.152: v83.83,23.08 83.83,24.22 83.45,24.6 79.76,24.6 79.41,24.96 MIC5.P$1
  Bottom 0.152: IC2.16 84.82,17.13 83.83,18.13 v83.83,23.08
S43  (via drill 0.35)
  Top 0.152: MIC8.P$1 123.1,35.88 123.71,35.27 127.13,35.27 127.77,34.64 135.01,34.64 135.52,34.13 136.53,34.13 136.91,33.75 v136.91,33.37
  Bottom 0.152: IC3.16 137.65,27.55 136.91,28.29 v136.91,33.37
S51  (via drill 0.35)
  Top 0.152: v36.46,33.75 36.46,35.78 36.08,36.16 28.33,36.16 27.87,36.62 MIC1.P$4
  Bottom 0.152: IC1.17 37.69,27.56 36.46,28.79 v36.46,33.75
S52  (via drill 0.35)
  Top 0.152: v83.07,22.32 83.07,23.84 82.68,24.22 72.52,24.22 72.07,24.68 MIC4.P$4
  Bottom 0.152: IC2.17 84.56,16.63 83.07,18.13 v83.07,22.32
S53  (via drill 0.35)
  Top 0.152: MIC9.P$4 115.25,35.6 115.96,34.89 126.88,34.89 127.52,34.25 134.63,34.25 135.14,33.75 136.02,33.75 136.28,33.49 v136.28,32.6
  Bottom 0.152: IC3.17 137.39,27.05 136.28,28.16 v136.28,32.6
S61  (via drill 0.35)
  Top 0.152: MIC1.P$1 22.77,35.25 23.25,34.76 v35.82,34.76
  Bottom 0.152: IC1.18 37.43,27.06 35.82,28.67 v35.82,34.76
S62  (via drill 0.35)
  Top 0.152: v82.3,23.08 82.3,23.46 81.92,23.84 67.44,23.84 66.96,24.32 MIC4.P$1
  Bottom 0.152: IC2.18 84.17,16.13 82.3,18 v82.3,23.08
S63  (via drill 0.35)
  Top 0.152: v135.39,33.11 135.14,33.37 134.88,33.37 134.37,33.87 127.13,33.87 126.5,34.51 110.62,34.51 110.14,34.99 MIC9.P$1
  Bottom 0.152: IC3.18 137.13,26.55 135.64,28.03 135.64,32.86 v135.39,33.11
SS1  (via drill 0.35)
  Top 0.152: v59.7,29.05 60.08,29.43 60.08,37.94 60.71,38.57 62.24,38.57 62.62,38.95 62.62,42.76 62.87,43.02 JP1.30
  Bottom 0.152: IC1.19 56.32,26.56 56.78,27.02 56.78,27.78 58.05,29.05 v59.7,29.05
SS2  (via drill 0.35)
  Top 0.152: v78.11,24.98 77.48,25.62 77.48,30.44 77.99,30.95 77.99,35.65 76.46,37.18 JP1.19
  Bottom 0.152: IC2.19 84.03,15.63 81.67,18 81.67,20.54 81.41,20.79 78.49,20.79 78.11,21.17 v78.11,24.98
SS3  (via drill 0.35)
  Top 0.152: v132.85,25.87 132.34,26.38 132.34,31.59 121.29,31.59 121.04,31.84 121.04,33.49 120.53,34 109.23,34 108.72,34.51 108.72,36.03 108.34,36.41 101.86,36.41 100.59,37.68 89.16,37.68 88.78,37.3 88.78,35.78 88.4,35.4 87.64,35.4 87.13,35.91 79.64,35.91 79,36.54 JP1.17
  Bottom 0.152: IC3.19 136.96,26.05 136.53,25.62 135.39,25.62 135.14,25.87 v132.85,25.87
TX1
  Bottom 0.152: IC1.3 42.51,34.56 42.81,34.25 44.33,34.25 44.58,34.51 44.58,37.18 45.47,38.06 45.47,40.6 46.36,41.49 56.65,41.49 57.41,40.73 60.21,40.73 60.84,41.37 60.84,43.65 61.22,44.03 80.02,44.03 80.14,43.91 80.14,42 80.65,41.49 86.24,41.49 86.62,41.11 JP1.11
TX2
  Bottom 0.152: IC2.3 88.7,23.63 89.42,24.35 89.42,30.19 87.89,31.71 87.89,32.6 86.75,33.75 86.75,38.32 87.64,39.21 88.65,39.21 89.16,39.72 JP1.9
TX3  (via drill 0.35)
  Top 0.152: v121.79,32.48 122.43,33.11 124.59,33.11 125.48,32.22 134.75,32.22 135.39,31.59 138.82,31.59 139.45,32.22 139.45,33.37 139.71,33.62 v141.23,33.62
  Bottom 0.152: IC3.3 140.8,34.05 v141.23,33.62 | JP1.3 96.78,39.46 97.16,39.08 104.53,39.08 105.29,38.32 105.29,36.29 105.8,35.78 107.58,35.78 108.08,35.27 112.02,35.27 112.53,34.76 112.53,32.73 113.16,32.1 120.91,32.1 121.29,32.48 v121.79,32.48